# Altium PCB Ad_Fpga.PcbDoc (part 4 of 8)
Units mil, origin at the board's own origin, x right, y up, seen from the top; angles counter-clockwise.
Board outline 5995 x 3921.26 mil, 6 copper layers (Top Layer, GND, Mid-Layer 1, Mid-Layer 2, VCC, Bottom Layer); 476 components, 538 nets, 2139 pads, 1047 vias.
Unrouted connection lines stored in the file: 2.
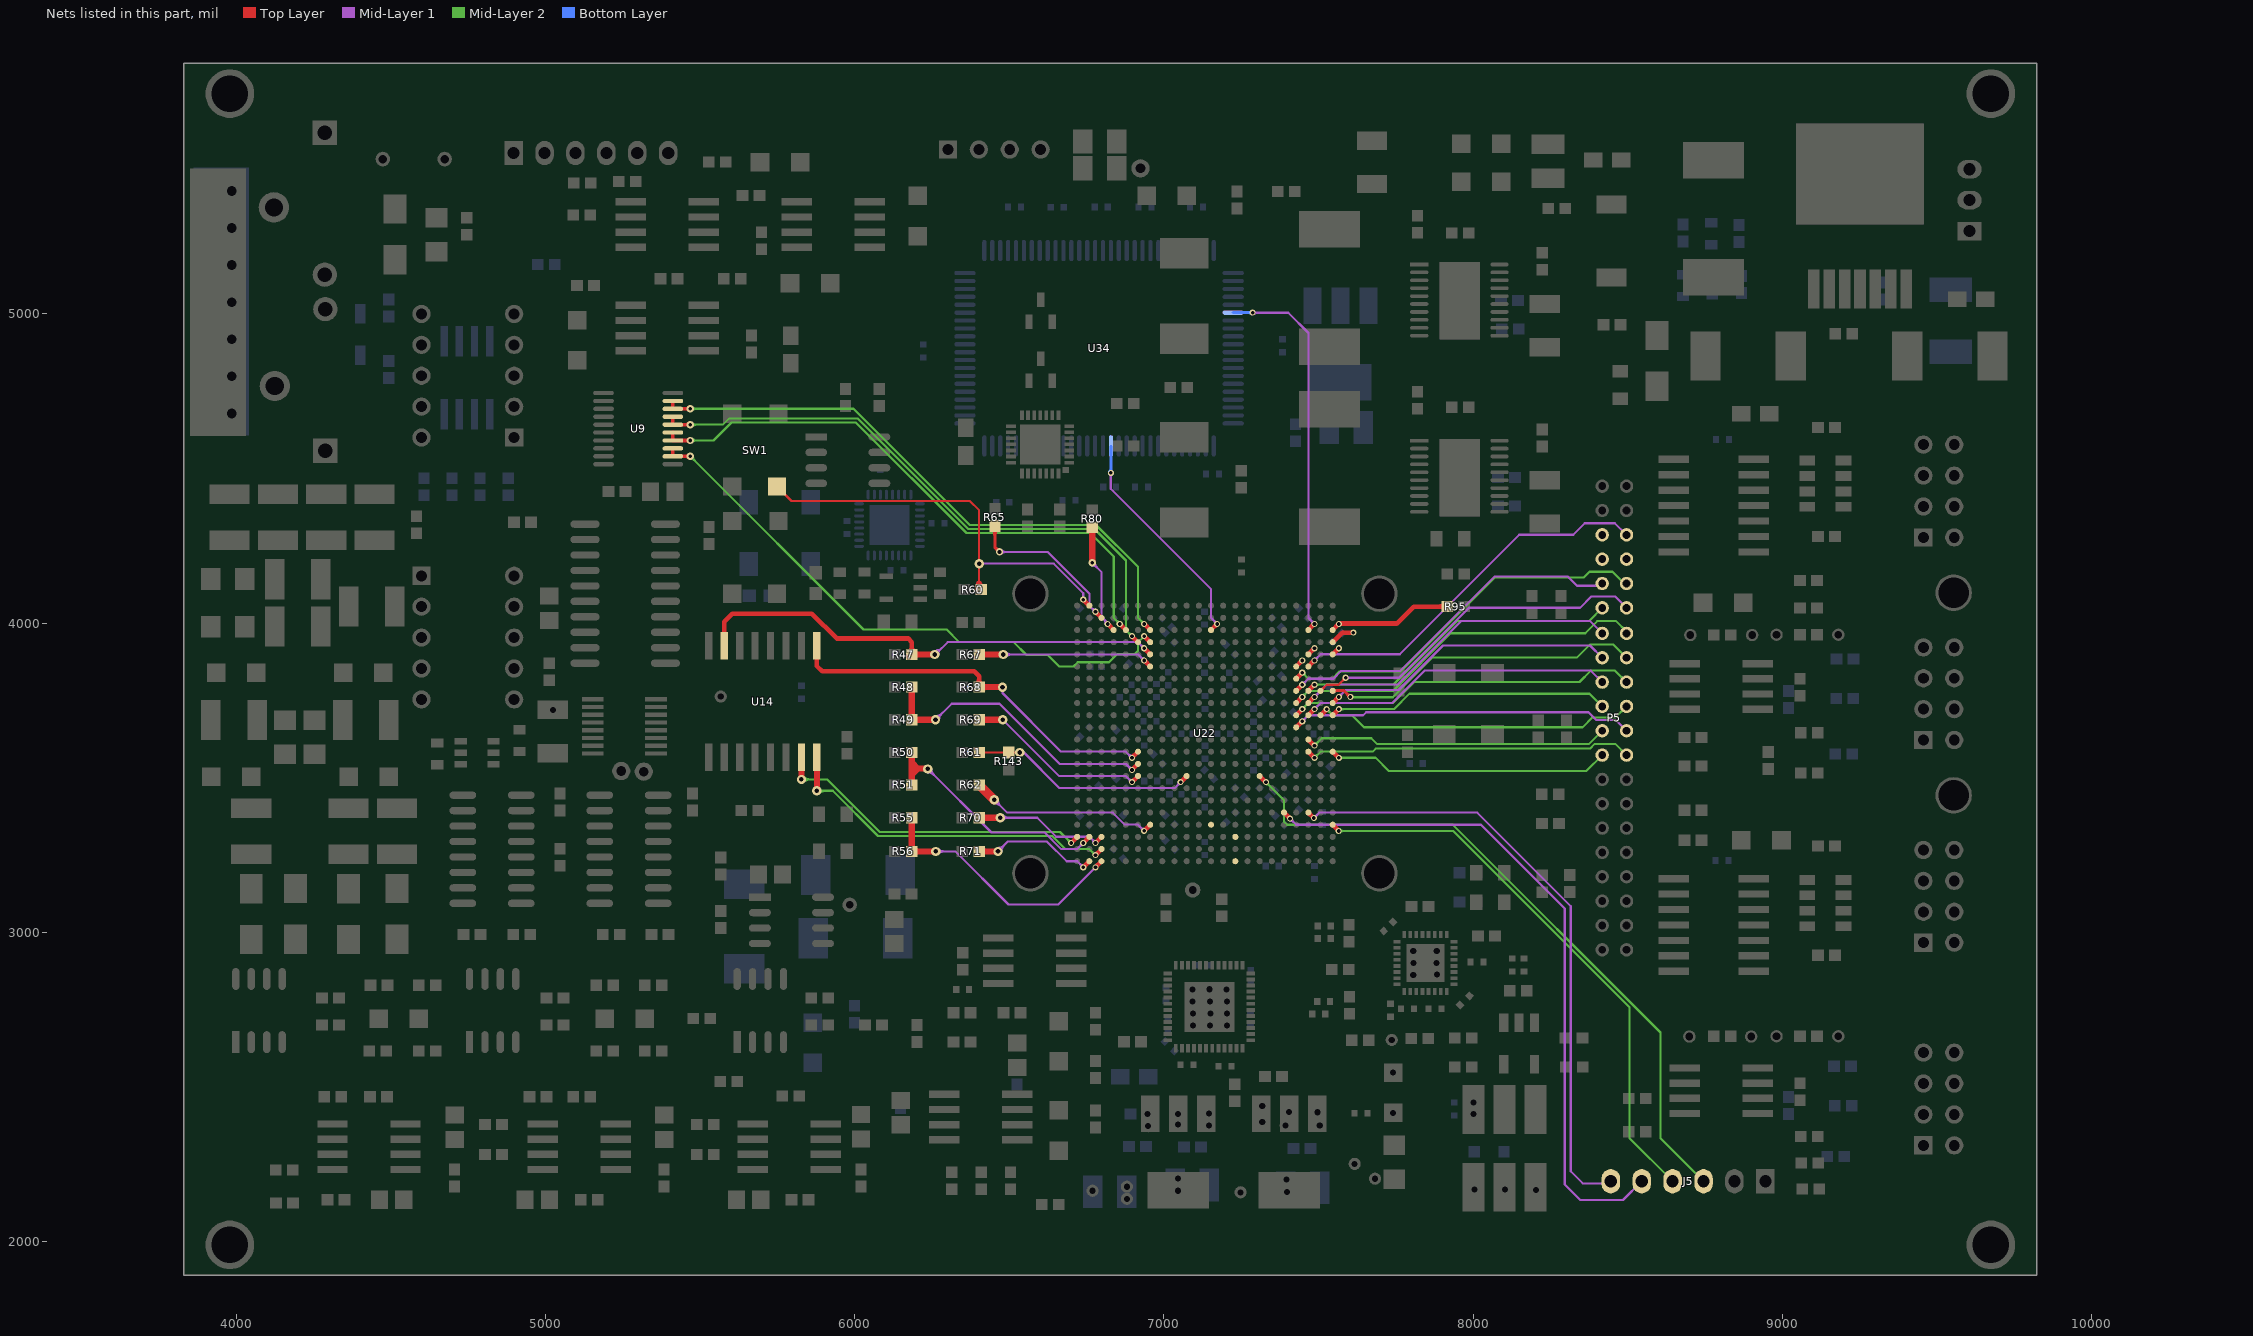
[diagram p8: the nets of this part, all layers, seen from the top]

## Via types
v1: diameter 19.68, hole 11.81, Top Layer to Bottom Layer, 523 vias
v2: diameter 50, hole 25, Top Layer to Bottom Layer, 162 vias
v3: diameter 30, hole 15, Top Layer to Bottom Layer, 100 vias
v4: diameter 39.37, hole 19.68, Top Layer to Bottom Layer, 75 vias
v5: diameter 31.5, hole 15.75, Top Layer to Bottom Layer, 44 vias
v6: diameter 40, hole 20, Top Layer to Bottom Layer, 38 vias
v7: diameter 24, hole 12, Top Layer to Bottom Layer, 33 vias
v8: diameter 47.24, hole 23.62, Top Layer to Bottom Layer, 24 vias
v9: diameter 59.06, hole 31.5, Top Layer to Bottom Layer, 10 vias
v10: diameter 60, hole 30, Top Layer to Bottom Layer, 9 vias
v11: diameter 25.98, hole 12.99, Top Layer to Bottom Layer, tented top, 9 vias
v12: diameter 23.62, hole 11.81, Top Layer to Bottom Layer, 8 vias
v13: diameter 50, hole 27.56, Top Layer to Bottom Layer, 4 vias
v14: diameter 51.18, hole 27.56, Top Layer to Bottom Layer, 2 vias
v15: diameter 39.37, hole 23.62, Top Layer to Bottom Layer, 2 vias
v16: diameter 80, hole 40, Top Layer to Bottom Layer, 1 vias
v17: diameter 47.24, hole 19.68, Top Layer to Bottom Layer, 1 vias
v18: diameter 47.24, hole 27.56, Top Layer to Bottom Layer, 1 vias
v19: diameter 22.05, hole 11.81, Top Layer to Bottom Layer, 1 vias

## Nets (pads, with @x,y where several pads share a name; then routed paths per layer and width w, separated by ;. In a path a pad name is that pad's centre, name@x,y a point inside that pad or via, vN(x,y) a via of type N, cw(c..) or ccw(c..) an arc to the next point about the centre after c; other vN are vias at no path point) (continued)
FIO11: P5.17 U22.A13 | length 957.4
  Top Layer w15: U22.A13@7546,3583.56 v1(7565.69,3563.87)
  Mid-Layer 2 w7: v1(7565.69,3563.87) 7684.9,3563.87 7727.77,3521 8325,3521 ; v1@7570.17,3559.39 cw(c7581,3548.56) 7581,3563.87 cw(c7581,3579.19) v1@7570.17,3568.36 ; 8339,3521 8325,3521 ; P5.17@8418,3572.64 8366.36,3521 8325,3521
FIO12: P5.18 U22.C13 | length 1095.4
  Top Layer w15: U22.C13@7467.26,3583.56 v1(7486.95,3563.87)
  Mid-Layer 2 w7: v1(7486.95,3563.87) 7506.97,3583.9 7675.9,3583.9 7685.5,3593.5 8378.51,3593.5 8394.01,3609 8460.38,3609 P5.18@8496.74,3572.64 ; v1@7486.95,3570.22 ccw(c7486.95,3585.53) 7497.77,3574.7 ccw(c7508.6,3563.87) v1@7493.29,3563.87
FIO13: P5.19 U22.C12 | length 1018.6
  Top Layer w15: U22.C12@7467.26,3622.93 v1(7486.95,3603.24)
  Mid-Layer 2 w7: v1(7486.95,3603.24) 7510.7,3627 7671,3627 7690,3608 8374.62,3608 P5.19@8418,3651.38 ; v1@7486.95,3609.59 ccw(c7486.95,3624.9) 7497.77,3614.07 ccw(c7508.6,3603.24) v1@7493.29,3603.24
FIO14: P5.20 U22.D11 | length 1141.8
  Top Layer w15: U22.D11@7427.89,3662.3 v1(7447.58,3681.99)
  Mid-Layer 1 w7: v1(7447.58,3681.99) 7466.92,3701.33 7564.52,3701.33 7564.69,3701.5 7644.5,3701.5 7654.5,3711.5 8354,3711.5 ; v1@7447.58,3688.33 ccw(c7447.58,3703.64) 7458.4,3692.81 ccw(c7469.23,3681.99) v1@7453.92,3681.99 ; 8357.64,3711.5 8354,3711.5 ; P5.20@8496.74,3651.38 8462.12,3686 8399,3686 8373.5,3711.5 8354,3711.5
FIO15: P5.21 U22.A10 | length 941.7
  Top Layer w15: U22.A10@7546,3701.67 v1(7565.69,3721.36)
  Mid-Layer 2 w7: v1(7565.69,3721.36) 7744.36,3721.36 7794,3771 8377.12,3771 P5.21@8418,3730.12 ; v1@7570.17,3716.87 cw(c7581,3706.04) 7581,3721.36 cw(c7581,3736.67) v1@7570.17,3725.84
FIO16: P5.22 U22.B10 | length 1074.7
  Top Layer w15: U22.B10@7506.63,3701.67 v1(7526.32,3721.36)
  Mid-Layer 2 w7: v1@7526.32,3715.01 cw(c7526.32,3699.7) 7537.14,3710.53 cw(c7547.97,3721.36) v1@7532.66,3721.36 ; v1(7526.32,3721.36) 7546.34,3701.33 7608.67,3701.33 7647.5,3662.5 8354.5,3662.5 8386,3694 8460.62,3694 P5.22@8496.74,3730.12
FIO17: P5.23 U22.C10 | length 1050
  Top Layer w15: U22.C10@7467.26,3701.67 v1(7486.95,3721.36)
  Mid-Layer 1 w7: v1(7486.95,3721.36) 7506.29,3740.7 7737.7,3740.7 7843,3846 8380.86,3846 P5.23@8418,3808.86 ; v1@7486.95,3727.7 ccw(c7486.95,3743.01) 7497.77,3732.18 ccw(c7508.6,3721.36) v1@7493.29,3721.36
FIO18: P5.24 U22.D10 | length 1168.1
  Top Layer w15: U22.D10@7427.89,3701.67 v1(7447.58,3721.36)
  Mid-Layer 2 w7: v1(7447.58,3721.36) 7466.92,3740.7 7740.7,3740.7 7809.36,3809.36 8344.36,3809.36 8381,3846 8459.6,3846 P5.24@8496.74,3808.86 ; v1@7447.58,3727.7 ccw(c7447.58,3743.01) 7458.4,3732.18 ccw(c7469.23,3721.36) v1@7453.92,3721.36
FIO19: P5.25 U22.A9 | length 989.4
  Top Layer w15: U22.A9@7546,3741.04 v1(7565.69,3760.73)
  Mid-Layer 1 w7: v1(7565.69,3760.73) 7587.96,3783 7759,3783 7903,3927 8378.6,3927 P5.25@8418,3887.6 ; v1@7565.69,3767.07 ccw(c7565.69,3782.38) 7576.51,3771.55 ccw(c7587.34,3760.73) v1@7572.03,3760.73
FIO20: P5.26 U22.A8 | length 1102.8
  Top Layer w10: U22.A8@7546,3780.41 7547.16,3781.57 7581.43,3781.57 v1@7603,3760 ; U22.A8@7549.42,3776.99 cw(c7560.49,3765.92) 7560.49,3781.57 ; 7593.49,3769.51 ccw(c7603,3779.01) v1@7603,3765.57 ; 7595.25,3767.75 cw(c7588.22,3760.73) v1@7598.16,3760.73
  Mid-Layer 2 w7: v1@7603,3760 7740,3760 7868.1,3888.1 8336.1,3888.1 8378,3930 8454.34,3930 P5.26@8496.74,3887.6 ; v1@7607.48,3756.24 cw(c7616.56,3747.17) 7616.56,3760 ; v1@7607.48,3765.21 ccw(c7620.06,3777.79) 7620.06,3760
  other v1: 7603,3760.73
FIO21: P5.27 U22.C9 | length 1101.8
  Top Layer w15: U22.C9@7467.26,3741.04 v1(7486.95,3760.73)
  Mid-Layer 1 w7: v1(7486.95,3760.73) 7527.22,3801 7756.92,3801 7962.92,4007 8377.34,4007 P5.27@8418,3966.34 ; v1@7486.95,3767.07 ccw(c7486.95,3782.38) 7497.77,3771.55 ccw(c7508.6,3760.73) v1@7493.29,3760.73
FIO22: P5.28 U22.D9 | length 1222.7
  Top Layer w15: U22.D9@7427.89,3741.04 v1(7447.58,3760.73)
  Mid-Layer 2 w7: v1(7447.58,3760.73) 7466.92,3780.07 7494.96,3780.07 7495.03,3780 7518.24,3780 7518.3,3780.07 7534.33,3780.07 7534.4,3780 7557.61,3780 7557.67,3780.07 7741.07,3780.07 7927.84,3966.84 8362.84,3966.84 8402,4006 8463,4006 8496.74,3972.26 P5.28@8496.74,3966.34 ; v1@7447.58,3767.07 ccw(c7447.58,3782.38) 7458.4,3771.55 ccw(c7469.23,3760.73) v1@7453.92,3760.73
FIO23: P5.29 U22.C8 | length 1110.1
  Top Layer w15: U22.C8@7467.26,3780.41 v1(7486.95,3800.1)
  Mid-Layer 2 w7: v1(7486.95,3800.1) 7487.76,3800.91 7742.91,3800.91 7948,4006 8374.98,4006 P5.29@8418,4049.02 ; v1@7491.43,3795.61 cw(c7504.23,3782.82) 7504.23,3800.91 ccw(c7504.23,3782.82) v1@7491.43,3795.61 ; v1@7491.43,3804.58 ccw(c7500.29,3813.44) 7500.29,3800.91 cw(c7500.29,3813.44) v1@7491.43,3804.58
FIO24: P5.30 U22.B8 | length 1275.8
  Top Layer w7: U22.B8@7506.63,3780.41 7526.22,3800 7565,3800 v1(7588,3823) ; U22.B8@7506.63,3786.75 ccw(c7506.63,3802.06) 7517.46,3791.24 ccw(c7528.28,3780.41) U22.B8@7512.97,3780.41 ; 7579.79,3816.04 cw(c7589.99,3813.31) v1@7587.87,3823.64 ; 7581.04,3814.79 ccw(c7578.31,3824.99) v1@7588.64,3822.87 ; 7577.17,3812.17 cw(c7588,3801.35) 7588,3816.66 ccw(c7588,3801.35) 7577.17,3812.17 ; 7577.17,3812.17 ccw(c7566.35,3823) 7581.66,3823 cw(c7566.35,3823) 7577.17,3812.17
  Mid-Layer 1 w7: v1(7588,3823) 7760.54,3823 7987.06,4049.52 8346.52,4049.52 8383,4086 8460,4086 8496.74,4049.26 P5.30@8496.74,4049.02 ; 7603.31,3823 cw(c7603.31,3838.31) 7592.48,3827.48 ccw(c7603.31,3838.31) 7603.31,3823 ; 7603.31,3823 ccw(c7603.31,3807.69) 7592.48,3818.52 cw(c7603.31,3807.69) 7603.31,3823
FIO25: P5.31 U22.D8 | length 1206.5
  Top Layer w15: U22.D8@7427.89,3780.41 v1(7447.58,3800.1)
  Mid-Layer 1 w7: v1(7447.58,3800.1) 7466.92,3819.44 7548.44,3819.44 7574,3845 7764.15,3845 8069.15,4150 8307,4150 8336.5,4120.5 8410.74,4120.5 P5.31@8418,4127.76 ; 7458.4,3810.92 cw(c7447.58,3821.75) 7447.58,3806.44 ccw(c7447.58,3821.75) 7458.4,3810.92 ; 7458.4,3810.92 ccw(c7469.23,3800.1) 7453.92,3800.1 cw(c7469.23,3800.1) 7458.4,3810.92
FIO26: P5.32 U22.D7 | length 1292.3
  Top Layer w15: U22.D7@7427.89,3819.78 v1(7447.58,3839.47)
  Mid-Layer 2 w7: v1(7447.58,3839.47) 7467.04,3820 7544,3820 7567,3843 7766.62,3843 8070.62,4147 8358,4147 8377,4166 8451,4166 8489.24,4127.76 P5.32@8496.74,4127.76 ; 7458.4,3828.64 cw(c7469.23,3839.47) 7453.92,3839.47 ccw(c7469.23,3839.47) 7458.4,3828.64 ; 7458.4,3828.64 ccw(c7447.58,3817.81) 7447.58,3833.12 cw(c7447.58,3817.81) 7458.4,3828.64
FIO27: P5.33
FIO28: P5.34
FIO29: P5.35
FIO30: P5.36 U22.C6 | length 1285.5
  Top Layer w15: U22.C6@7467.26,3859.15 v1(7486.95,3878.84)
  Mid-Layer 1 w7: v1(7486.95,3878.84) 7506.97,3898.86 7762.86,3898.86 8149.74,4285.74 8324,4285.74 8361,4322.74 8361,4323 8458.98,4323 P5.36@8496.74,4285.24 ; 7497.77,3889.66 cw(c7486.95,3900.49) 7486.95,3885.18 ccw(c7486.95,3900.49) 7497.77,3889.66 ; 7497.77,3889.66 ccw(c7508.6,3878.84) 7493.29,3878.84 cw(c7508.6,3878.84) 7497.77,3889.66
FIO31: U22.D6 | length 27.8
  Top Layer w15: U22.D6@7427.89,3859.15 v1(7447.58,3878.84)
FIO32: U22.A5 | length 27.8
  Top Layer w15: U22.A5@7546,3898.52 v1(7565.69,3918.21)
FIO33: U22.C5 | length 27.8
  Top Layer w15: U22.C5@7467.26,3898.52 v1(7486.95,3918.21)
FIO34: U22.A4 | length 79.9
  Top Layer w15: U22.A4@7546,3937.89 7577.11,3969 v1(7613,3969)
FJDQ1A: U9.2 U9.3 U22.T4 | length 2024.1
  Top Layer w11.81: U9.3@5411.2,4565.02 U9.2@5411.2,4539.43 v12(5467.57,4539.43) ; 5453.31,4539.43 cw(c5453.31,4525.18) 5463.39,4535.26 ccw(c5453.31,4525.18) 5453.31,4539.43 ; 5453.31,4539.43 ccw(c5453.31,4553.69) 5463.39,4543.61 cw(c5453.31,4553.69) 5453.31,4539.43
  Top Layer w15: v1(6935.77,3957.57) U22.T4@6955.45,3937.89
  Mid-Layer 2 w7: v12(5467.57,4539.43) 6028,3979 6297,3979 6338,3938 6514,3938 6555.45,3896.55 6624.45,3896.55 6661.51,3859.49 6707.55,3859.49 6721.06,3873 6822,3873 6847.86,3898.86 6904.4,3898.86 6915.73,3910.19 6915.73,3937.54 v1(6935.77,3957.57) ; 5481.75,4525.25 cw(c5495.94,4539.43) 5475.88,4539.43 ccw(c5495.94,4539.43) 5481.75,4525.25 ; 5481.75,4525.25 ccw(c5467.57,4511.06) 5467.57,4531.12 cw(c5467.57,4511.06) 5481.75,4525.25
FJDQ1B: U9.4 U9.5 U22.V3 | length 2066
  Top Layer w11.81: U9.5@5411.2,4616.2 U9.4@5411.2,4590.61 v12(5467.57,4590.61) ; 5453.31,4590.61 cw(c5453.31,4576.36) 5463.39,4586.44 ccw(c5453.31,4576.36) 5453.31,4590.61 ; 5453.31,4590.61 ccw(c5453.31,4604.87) 5463.39,4594.79 cw(c5453.31,4604.87) 5453.31,4590.61
  Top Layer w15: v1(6857.02,3996.95) U22.V3@6876.71,3977.26
  Mid-Layer 2 w7: v12(5467.57,4590.61) 5542.61,4590.61 5601,4649 6003,4649 6361,4291 6762,4291 6837.68,4215.32 6837.68,4016.29 v1(6857.02,3996.95) ; 5487.63,4590.61 cw(c5487.63,4610.68) 5473.44,4596.49 ccw(c5487.63,4610.68) 5487.63,4590.61 ; 5487.63,4590.61 ccw(c5487.63,4570.55) 5473.44,4584.74 cw(c5487.63,4570.55) 5487.63,4590.61 ; 6846.19,4007.77 cw(c6835.37,3996.95) 6850.68,3996.95 ccw(c6835.37,3996.95) 6846.19,4007.77 ; 6846.19,4007.77 ccw(c6857.02,4018.6) 6857.02,4003.29 cw(c6857.02,4018.6) 6846.19,4007.77
FJDQ2A: U9.6 U9.7 U22.U4 | length 2126.5
  Top Layer w11.81: U9.7@5411.2,4667.39 U9.6@5411.2,4641.8 v12(5467.57,4641.8) ; 5453.31,4641.8 cw(c5453.31,4627.54) 5463.39,4637.62 ccw(c5453.31,4627.54) 5453.31,4641.8 ; 5453.31,4641.8 ccw(c5453.31,4656.05) 5463.39,4645.97 cw(c5453.31,4656.05) 5453.31,4641.8
  Top Layer w15: v1(6896.39,3957.58) U22.U4@6916.08,3937.89
  Mid-Layer 2 w7: v12(5467.57,4641.8) 5572.8,4641.8 5593,4662 6008.38,4662 6366.38,4304 6775,4304 6877.05,4201.95 6877.05,3976.92 v1(6896.39,3957.58) ; 5487.63,4641.8 cw(c5487.63,4661.86) 5473.44,4647.67 ccw(c5487.63,4661.86) 5487.63,4641.8 ; 5487.63,4641.8 ccw(c5487.63,4621.73) 5473.44,4635.92 cw(c5487.63,4621.73) 5487.63,4641.8 ; 6885.56,3968.4 cw(c6874.74,3957.58) 6890.05,3957.58 ccw(c6874.74,3957.58) 6885.56,3968.4 ; 6885.56,3968.4 ccw(c6896.39,3979.23) 6896.39,3963.92 cw(c6896.39,3979.23) 6885.56,3968.4
FJDQ2B: U9.8 U9.9 U22.T3 | length 2118.7
  Top Layer w11.81: U9.9@5411.2,4718.57 U9.8@5411.2,4692.98 v12(5467.57,4692.98) ; 5453.31,4692.98 cw(c5453.31,4678.72) 5463.39,4688.8 ccw(c5453.31,4678.72) 5453.31,4692.98 ; 5453.31,4692.98 ccw(c5453.31,4707.23) 5463.39,4697.15 cw(c5453.31,4707.23) 5453.31,4692.98
  Top Layer w15: v1(6935.76,3996.95) U22.T3@6955.45,3977.26
  Mid-Layer 2 w7: v12(5467.57,4692.98) 5995.79,4692.98 6371.77,4317 6780.38,4317 6915.73,4181.65 6915.73,4016.97 v1(6935.76,3996.95) ; 5487.63,4692.98 cw(c5487.63,4713.04) 5473.44,4698.85 ccw(c5487.63,4713.04) 5487.63,4692.98 ; 5487.63,4692.98 ccw(c5487.63,4672.91) 5473.44,4687.1 cw(c5487.63,4672.91) 5487.63,4692.98 ; 6924.93,4007.77 cw(c6914.11,3996.95) 6929.42,3996.95 ccw(c6914.11,3996.95) 6924.93,4007.77 ; 6924.93,4007.77 ccw(c6935.76,4018.6) 6935.76,4003.29 cw(c6935.76,4018.6) 6924.93,4007.77
FPGA_AWAKE: R62.2 U22.T19 | length 690.7
  Top Layer w15: v1(6935.76,3327.65) U22.T19@6955.45,3347.34
  Top Layer w30: R62.2@6402,3476 6450,3428 v3(6451,3428)
  Mid-Layer 1 w7: v3@6451,3416.5 cw(c6451,3388.74) 6470.63,3408.37 cw(c6490.26,3428) v3@6462.5,3428 ; v3(6451,3428) 6492.64,3386.36 6834.64,3386.36 6873.32,3347.68 6915.73,3347.68 v1(6935.76,3327.65) ; v1@6929.42,3327.65 ccw(c6914.11,3327.65) 6924.93,3338.48 ccw(c6935.76,3349.31) v1@6935.76,3333.99
FPGA_CCLK: U14.16 U22.Y21 | length 1191.7
  Top Layer w15: v1(6778.28,3248.91) U22.Y21@6797.97,3268.6
  Top Layer w20: v3(5877,3457) U14.16@5877,3565.76
  Mid-Layer 2 w7: v3(5877,3457) 5928.62,3457 6074.62,3311 6638.14,3311 6680.2,3268.94 6758.25,3268.94 v1(6778.28,3248.91) ; v3@5885.13,3448.87 cw(c5904.76,3429.24) 5904.76,3457 cw(c5904.76,3484.76) v3@5885.13,3465.13 ; v1@6771.94,3248.91 ccw(c6756.63,3248.91) 6767.45,3259.74 ccw(c6778.28,3270.57) v1@6778.28,3255.25
FPGA_CMP_CS_B: R70.2 U22.Y20 | length 536.4
  Top Layer w15: v1(6778.28,3288.28) U22.Y20@6797.97,3307.97
  Top Layer w20: R70.2@6402,3370 v3(6470,3370) ; R70.2@6408.66,3364.34 cw(c6422.31,3350.69) 6422.31,3370 cw(c6422.31,3389.31) R70.2@6408.66,3375.66
  Mid-Layer 1 w7: v3(6470,3370) 6590,3370 6651.69,3308.31 6758.94,3308.31 6778.28,3288.97 v1(6778.28,3288.28) ; v3@6478.13,3361.87 cw(c6497.76,3342.24) 6497.76,3370 cw(c6497.76,3397.76) v3@6478.13,3378.13 ; 6766.97,3300.28 cw(c6754.97,3288.28) v1@6771.94,3288.28 ; 6768.62,3298.62 ccw(c6778.28,3308.28) v1@6778.28,3294.62
FPGA_DONE: R55.1 R56.1 U22.Y22 | length 986.9
  Top Layer w15: v1(6778.28,3209.54) U22.Y22@6797.97,3229.23
  Top Layer w20: R56.1@6178.34,3266.66 ccw(c6164.69,3280.31) 6184,3280.31 ccw(c6203.31,3280.31) R56.1@6189.66,3266.66 ; R55.1@6178.34,3364.34 cw(c6164.69,3350.69) 6184,3350.69 cw(c6203.31,3350.69) R55.1@6189.66,3364.34 ; R55.1@6184,3370 R56.1@6184,3261 v3(6262,3261) ; R56.1@6190.66,3255.34 cw(c6204.31,3241.69) 6204.31,3261 cw(c6204.31,3280.31) R56.1@6190.66,3266.66
  Mid-Layer 1 w7: v3(6262,3261) 6325,3261 6497,3089 6657.74,3089 v1(6778.28,3209.54) ; v3@6270.13,3252.87 cw(c6289.76,3233.24) 6289.76,3261 cw(c6289.76,3288.76) v3@6270.13,3269.13
FPGA_HSWAPEN: R95.2 U22.A3 | length 442.2
  Top Layer w15: U22.A3@7546,3977.26 v1(7565.69,3996.95) 7566.99,3998.25 7753.25,3998.25 7808,4053 7895,4053 R95.2@7917,4053 ; R95.2@7908.58,4045.58 ccw(c7890.65,4027.65) 7890.65,4053 ccw(c7890.65,4078.35) R95.2@7908.58,4060.42
FPGA_INIT_B: R67.2 U22.T6 | length 779
  Top Layer w15: v1(6935.76,3878.84) U22.T6@6955.45,3859.15
  Top Layer w20: R67.2@6402,3898 6480,3898 v3(6480.18,3898.18) ; R67.2@6408.66,3892.34 cw(c6422.31,3878.69) 6422.31,3898 cw(c6422.31,3917.31) R67.2@6408.66,3903.66
  Mid-Layer 1 w7: v3(6480.18,3898.18) 6916.42,3898.18 v1(6935.76,3878.84) ; v3@6488.31,3890.05 cw(c6507.94,3870.41) 6507.94,3898.18 ; v3@6488.31,3890.05 cw(c6507.94,3870.41) 6507.94,3898.18 ; v3@6488.31,3890.05 cw(c6507.94,3870.41) 6507.94,3898.18 ; v3@6488.31,3906.31 ccw(c6507.94,3925.94) 6507.94,3898.18 ; v3@6488.31,3906.31 ccw(c6507.94,3925.94) 6507.94,3898.18 ; v3@6488.31,3906.31 ccw(c6507.94,3925.94) 6507.94,3898.18 ; 6924.93,3889.66 cw(c6914.11,3878.84) 6929.42,3878.84 ccw(c6914.11,3878.84) 6924.93,3889.66 ; 6924.93,3889.66 ccw(c6935.76,3900.49) 6935.76,3885.18 cw(c6935.76,3900.49) 6924.93,3889.66
FPGA_M0: R71.2 U22.AA22 | length 510.6
  Top Layer w15: v1(6738.91,3209.54) U22.AA22@6758.6,3229.23
  Top Layer w20: R71.2@6402,3261 v3(6463,3261) ; R71.2@6408.66,3255.34 cw(c6422.31,3241.69) 6422.31,3261 cw(c6422.31,3280.31) R71.2@6408.66,3266.66
  Mid-Layer 1 w7: v3(6463,3261) 6495,3293 6621,3293 6685,3229 6719.45,3229 v1(6738.91,3209.54) ; v3@6463,3272.5 ccw(c6463,3300.26) 6482.63,3280.63 ccw(c6502.26,3261) v3@6474.5,3261 ; v1@6732.57,3209.54 ccw(c6717.26,3209.54) 6728.08,3220.37 ccw(c6738.91,3231.2) v1@6738.91,3215.88
FPGA_M1: R69.2 U22.U15 | length 660.2
  Top Layer w15: v1(6896.39,3485.13) U22.U15@6916.08,3504.82
  Top Layer w20: R69.2@6402,3687 v3(6478.5,3687) ; R69.2@6408.66,3681.34 cw(c6422.31,3667.69) 6422.31,3687 cw(c6422.31,3706.31) R69.2@6408.66,3692.66
  Mid-Layer 1 w7: v3(6478.5,3687) 6661.03,3504.47 6877.05,3504.47 v1(6896.39,3485.13) ; v1@6890.05,3485.13 ccw(c6874.74,3485.13) 6885.56,3495.96 ccw(c6896.39,3506.79) v1@6896.39,3491.47
FPGA_MISO0: U14.15 U22.AB20 | length 1125
  Top Layer w15: v1(6699.54,3288.28) U22.AB20@6719.23,3307.97
  Top Layer w20: v3(5827,3494) U14.15@5827,3565.76
  Mid-Layer 2 w7: v3(5827,3494) 5910,3494 6080,3324 6663.82,3324 v1(6699.54,3288.28) ; v3@5835.13,3485.87 cw(c5854.76,3466.24) 5854.76,3494 cw(c5854.76,3521.76) v3@5835.13,3502.13 ; v1@6693.2,3288.28 ccw(c6677.89,3288.28) 6688.71,3299.11 ccw(c6699.54,3309.94) v1@6699.54,3294.62
FPGA_MISO1: R50.1 R51.1 U22.AA20 | length 989.4
  Top Layer w15: v1(6738.91,3288.28) U22.AA20@6758.6,3307.97
  Top Layer w20: R51.1@6178.34,3481.66 ccw(c6164.69,3495.31) 6184,3495.31 ccw(c6203.31,3495.31) R51.1@6189.66,3481.66 ; R50.1@6178.34,3575.84 cw(c6164.69,3562.19) 6184,3562.19 cw(c6203.31,3562.19) R50.1@6189.66,3575.84 ; R51.1@6184,3476 6184,3508.75 ; R50.1@6184,3581.5 6184,3548.75 ; v3(6236,3528) 6235.25,3528.75 6204,3528.75 ; 6184,3508.75 6184,3528.75 ; 6184,3508.75 6204,3528.75 ; 6184,3528.75 6204,3528.75 ; 6184,3528.75 6184,3548.75 ; 6184,3548.75 6204,3528.75
  Mid-Layer 1 w7: v3@6236,3516.5 cw(c6236,3488.74) 6255.63,3508.37 cw(c6275.26,3528) v3@6247.5,3528 ; v3(6236,3528) 6442,3322 6614,3322 6667.75,3268.25 6718.88,3268.25 v1(6738.91,3288.28) ; v1@6732.57,3288.28 cw(c6717.26,3288.28) 6728.08,3277.45 cw(c6738.91,3266.63) v1@6738.91,3281.94
FPGA_MISO2: R48.1 R49.2 U22.U14 | length 1114.8
  Top Layer w15: v1(6896.39,3524.5) U22.U14@6916.08,3544.19
  Top Layer w20: R49.2@6178.34,3692.66 ccw(c6164.69,3706.31) 6184,3706.31 ccw(c6203.31,3706.31) R49.2@6189.66,3692.66 ; R48.1@6178.34,3786.84 cw(c6164.69,3773.19) 6184,3773.19 cw(c6203.31,3773.19) R48.1@6189.66,3786.84 ; R48.1@6184,3792.5 R49.2@6184,3687 v3(6261,3687) ; R49.2@6190.66,3681.34 cw(c6204.31,3667.69) 6204.31,3687 cw(c6204.31,3706.31) R49.2@6190.66,3692.66
  Mid-Layer 1 w7: v3(6261,3687) 6313,3739 6467.62,3739 6662.72,3543.89 6877,3543.89 v1(6896.39,3524.5) ; v3@6261,3698.5 ccw(c6261,3726.26) 6280.63,3706.63 ccw(c6300.26,3687) v3@6272.5,3687 ; v1@6890.05,3524.5 ccw(c6874.74,3524.5) 6885.56,3535.33 ccw(c6896.39,3546.16) v1@6896.39,3530.84
FPGA_MISO3: R68.1 U14.1 U22.U13 | length 1361.5
  Top Layer w15: U14.1@5877,3926 5877,3861 5894,3844 6386,3844 6402,3828 R68.1@6402,3792.5 ; R68.1@6394.58,3799.92 ccw(c6376.65,3817.85) 6402,3817.85 ccw(c6427.35,3817.85) R68.1@6409.42,3799.92 ; v1(6896.39,3563.88) U22.U13@6916.08,3583.56
  Top Layer w20: R68.1@6402,3792.5 v3(6477.5,3792.5) ; R68.1@6408.66,3786.84 cw(c6422.31,3773.19) 6422.31,3792.5 cw(c6422.31,3811.81) R68.1@6408.66,3798.16
  Mid-Layer 1 w7: v3(6477.5,3792.5) 6477.5,3773.4 6667,3583.9 6876.37,3583.9 v1(6896.39,3563.88) ; v1@6890.05,3563.88 ccw(c6874.74,3563.88) 6885.57,3574.7 ccw(c6896.39,3585.53) v1@6896.39,3570.22
FPGA_ONCHIP_TERM1: R80.1 U22.W3 | length 510.2
  Top Layer w15: v1(6817.65,3996.95) U22.W3@6837.34,3977.26
  Top Layer w20: R80.1@6762.34,4303.34 cw(c6748.69,4289.69) 6768,4289.69 cw(c6787.31,4289.69) R80.1@6773.66,4303.34 ; v7(6768,4195) R80.1@6768,4310
  Mid-Layer 1 w7: v7(6768,4195) 6798.31,4164.69 6798.31,4020.61 6817.65,4001.27 v1(6817.65,3996.95) ; 6808.83,4006.2 ccw(c6823.23,4010.06) v1@6817.39,3996.34 ; 6782.51,4180.49 cw(c6797.02,4195) 6776.5,4195 ccw(c6797.02,4195) 6782.51,4180.49 ; 6782.51,4180.49 ccw(c6768,4165.98) 6768,4186.5 cw(c6768,4165.98) 6782.51,4180.49 ; 6803.77,4015.16 cw(c6785.56,3996.95) 6811.31,3996.95 ccw(c6785.56,3996.95) 6803.77,4015.16
FPGA_ONCHIP_TERM2: R65.1 U22.Y2 | length 746.6
  Top Layer w10: R65.1@6443.81,4303.81 cw(c6421.62,4281.62) 6453,4281.62 cw(c6484.38,4281.62) R65.1@6462.19,4303.81 ; R65.1@6453,4314 6453,4245 v7(6468,4230) ; 6456.05,4241.95 cw(c6444.1,4230) 6461,4230 ccw(c6444.1,4230) 6456.05,4241.95 ; 6456.05,4241.95 ccw(c6468,4253.9) 6468,4237 cw(c6468,4253.9) 6456.05,4241.95
  Top Layer w15: v1(6778.28,4036.32) U22.Y2@6797.97,4016.63
  Mid-Layer 1 w7: v7(6468,4230) 6624,4230 6758.6,4095.4 6758.6,4056 v1(6778.28,4036.32) ; 6488.52,4230 cw(c6488.52,4250.52) 6474.01,4236.01 ccw(c6488.52,4250.52) 6488.52,4230 ; 6488.52,4230 ccw(c6488.52,4209.48) 6474.01,4223.99 cw(c6488.52,4209.48) 6488.52,4230 ; 6767.45,4047.14 cw(c6756.63,4036.32) 6771.94,4036.32 ccw(c6756.63,4036.32) 6767.45,4047.14 ; 6767.45,4047.14 ccw(c6778.28,4057.97) 6778.28,4042.66 cw(c6778.28,4057.97) 6767.45,4047.14
FPGA_PROG_B: R60.1 SW1.1 U22.AA1 | length 1398.5
  Top Layer w7: SW1.1@5748,4442 5795,4395 6372,4395 6402,4365 v3(6402,4192) R60.1@6402,4108
  Top Layer w15: v1(6738.91,4075.69) U22.AA1@6758.6,4056
  Top Layer w20: R60.1@6396.34,4113.66 ccw(c6382.69,4127.31) 6402,4127.31 ccw(c6421.31,4127.31) R60.1@6407.66,4113.66
  Mid-Layer 1 w7: v3(6402,4192) 6643.62,4192 6738.91,4096.7 v1(6738.91,4075.69)
FPGA_SPI_CS: R47.1 U14.7 U22.T5 | length 1807.4
  Top Layer w15: U14.7@5577,3926 5577,4004 5603,4030 5861,4030 5941,3950 6172,3950 6184,3938 R47.1@6184,3898 ; R47.1@6176.58,3905.42 ccw(c6158.65,3923.35) 6184,3923.35 ccw(c6209.35,3923.35) R47.1@6191.42,3905.42 ; v1(6935.76,3918.21) U22.T5@6955.45,3898.52
  Top Layer w20: R47.1@6184,3898 v3(6258,3898) ; R47.1@6190.66,3892.34 cw(c6204.31,3878.69) 6204.31,3898 cw(c6204.31,3917.31) R47.1@6190.66,3903.66
  Mid-Layer 1 w7: v3@6255.58,3898.64 cw(c6274.59,3893.58) 6269.5,3912.58 ; v3(6258,3898) 6258,3896 6300.23,3938.23 6915.73,3938.23 v1(6935.76,3918.21) ; 6924.93,3929.03 cw(c6914.11,3918.21) 6929.42,3918.21 ccw(c6914.11,3918.21) 6924.93,3929.03 ; 6924.93,3929.03 ccw(c6935.76,3939.86) 6935.76,3924.55 cw(c6935.76,3939.86) 6924.93,3929.03 ; v3@6258,3909.5 ccw(c6258,3942.09) 6281.05,3919.05 cw(c6258,3942.09) v3@6258,3909.5 ; v3@6269.5,3898 cw(c6292.44,3898) 6276.22,3914.22 ccw(c6292.44,3898) v3@6269.5,3898
FPGA_SUSPEND: R61.2 R143.2 U22.N15 | length 761.1
  Top Layer w7: R61.2@6402,3581.5 6402.5,3581 R143.2@6498,3581 v3(6533,3581)
  Top Layer w15: v1(7053.87,3485.13) U22.N15@7073.56,3504.82
  Mid-Layer 1 w7: v3(6533,3581) v3@6535,3581 ; v3@6536,3582 v3@6535,3581 ; v1@7047.53,3485.13 cw(c7032.22,3485.13) 7043.05,3474.3 cw(c7053.87,3463.48) v1@7053.87,3478.79 ; v1(7053.87,3485.13) 7034.53,3465.79 6662.21,3465.79 6547,3581 v3@6535,3581
FPGA_TCK: J5.3 U22.G15 | length 2243.7
  Top Layer w15: U22.G15@7309.78,3504.82 7329.6,3485 v1(7330,3485)
  Mid-Layer 2 w7: v1@7330,3478.66 cw(c7330,3463.35) 7340.83,3474.17 cw(c7351.65,3485) v1@7336.34,3485 ; v1(7330,3485) 7388.66,3426.34 7388.66,3357.34 7399,3347 7934.38,3347 8606.3,2675.09 8606.3,2333.31 J5.3@8745.8,2193.8
FPGA_TDI: J5.5 U22.E18 | length 2249.2
  Top Layer w15: U22.E18@7388.52,3386.71 v1(7408,3367.23) v1@7408,3367
  Mid-Layer 1 w7: v1@7408,3360.89 cw(c7408,3345.57) 7418.83,3356.4 cw(c7429.65,3367.23) v1@7414.34,3367.23 ; v1(7408,3367.23) 7428.23,3347 8026,3347 8297,3076 8297,2183 8347,2133 8485,2133 J5.5@8545.8,2193.8
FPGA_TDO: J5.4 U22.A19 | length 1849.5
  Top Layer w15: U22.A19@7546,3347.34 7546,3347 v1@7565,3328
  Mid-Layer 2 w7: v1(7565,3327) 7936,3327 8506.3,2756.7 8506.3,2333.31 J5.4@8645.8,2193.8 ; v1@7569.48,3322.52 cw(c7580.31,3311.69) 7580.31,3327 cw(c7580.31,3342.31) v1@7569.48,3331.48
FPGA_TMS: J5.6 U22.C18 | length 2019.4
  Top Layer w15: U22.C18@7467.26,3386.71 v1(7484.97,3369)
  Mid-Layer 1 w7: v1(7484.97,3369) 7502.33,3386.36 8013.64,3386.36 8316,3084 8316,2226 8355,2187 8439,2187 J5.6@8445.8,2193.8 ; v1@7484.97,3375.34 ccw(c7484.97,3390.65) 7495.8,3379.83 ccw(c7506.62,3369) v1@7491.31,3369
FT#: U22.L3 U34.14 | length 879.5
  Top Layer w15: U22.L3@7152.3,3977.26 v1(7171.99,3996.95)
  Mid-Layer 1 w7: v1(6828,4486) 6828,4434.23 7152.64,4109.59 7152.64,4016.29 v1(7171.99,3996.95) ; 6828,4470.69 cw(c6843.31,4470.69) 6832.48,4481.52 ccw(c6843.31,4470.69) 6828,4470.69 ; 6828,4470.69 ccw(c6812.69,4470.69) 6823.52,4481.52 cw(c6812.69,4470.69) 6828,4470.69 ; 7161.16,4007.77 cw(c7150.33,3996.95) 7165.64,3996.95 ccw(c7150.33,3996.95) 7161.16,4007.77 ; 7161.16,4007.77 ccw(c7171.99,4018.6) 7171.99,4003.29 cw(c7171.99,4018.6) 7161.16,4007.77
  Bottom Layer w10: v1(6828,4486) 6828.39,4486.39 U34.14@6828.39,4573.06 ; v1@6824.58,4489.42 ccw(c6815.38,4498.62) 6828.39,4498.62 cw(c6815.38,4498.62) v1@6824.58,4489.42 ; 6828.39,4496.76 ccw(c6838.76,4496.76) 6831.42,4489.42 cw(c6838.76,4496.76) 6828.39,4496.76
G#: U22.C3 U34.86 | length 1338.8
  Top Layer w15: U22.C3@7467.26,3977.26 v1(7486.95,3996.95)
  Mid-Layer 1 w7: v1(7287,5004) 7402,5004 ; v1@7291.48,4999.52 cw(c7302.31,4988.69) 7302.31,5004 cw(c7302.31,5019.31) v1@7291.48,5008.48 ; 7401.84,5004.16 7402,5004 ; v1(7486.95,3996.95) 7467.6,4016.29 7467.6,4938.4 7402,5004 ; 7476.12,4007.77 cw(c7465.29,3996.95) 7480.6,3996.95 ccw(c7465.29,3996.95) 7476.12,4007.77 ; 7476.12,4007.77 ccw(c7486.95,4018.6) 7486.95,4003.29 cw(c7486.95,4018.6) 7476.12,4007.77
  Bottom Layer w10: U34.86@7224.06,5004.16 7286.84,5004.16 v1(7287,5004) ; 7274.93,5004.16 cw(c7274.93,4991.93) v1@7283.58,5000.58 ; 7275.69,5004.16 ccw(c7275.69,5015.31) v1@7283.58,5007.42
GCLK4: U22.J22
GCLK5: U22.J20
GCLK6: U22.L19